# Altium PCB PCB.PcbDoc
Units mm, origin at the board's own origin, x right, y up, seen from the top; angles counter-clockwise.
Board outline 65.52 x 55.9 mm, 2 copper layers (Top Layer, Bottom Layer); 9 components, 53 nets, 128 pads, 12 vias.
Unrouted connection lines stored in the file: 59.
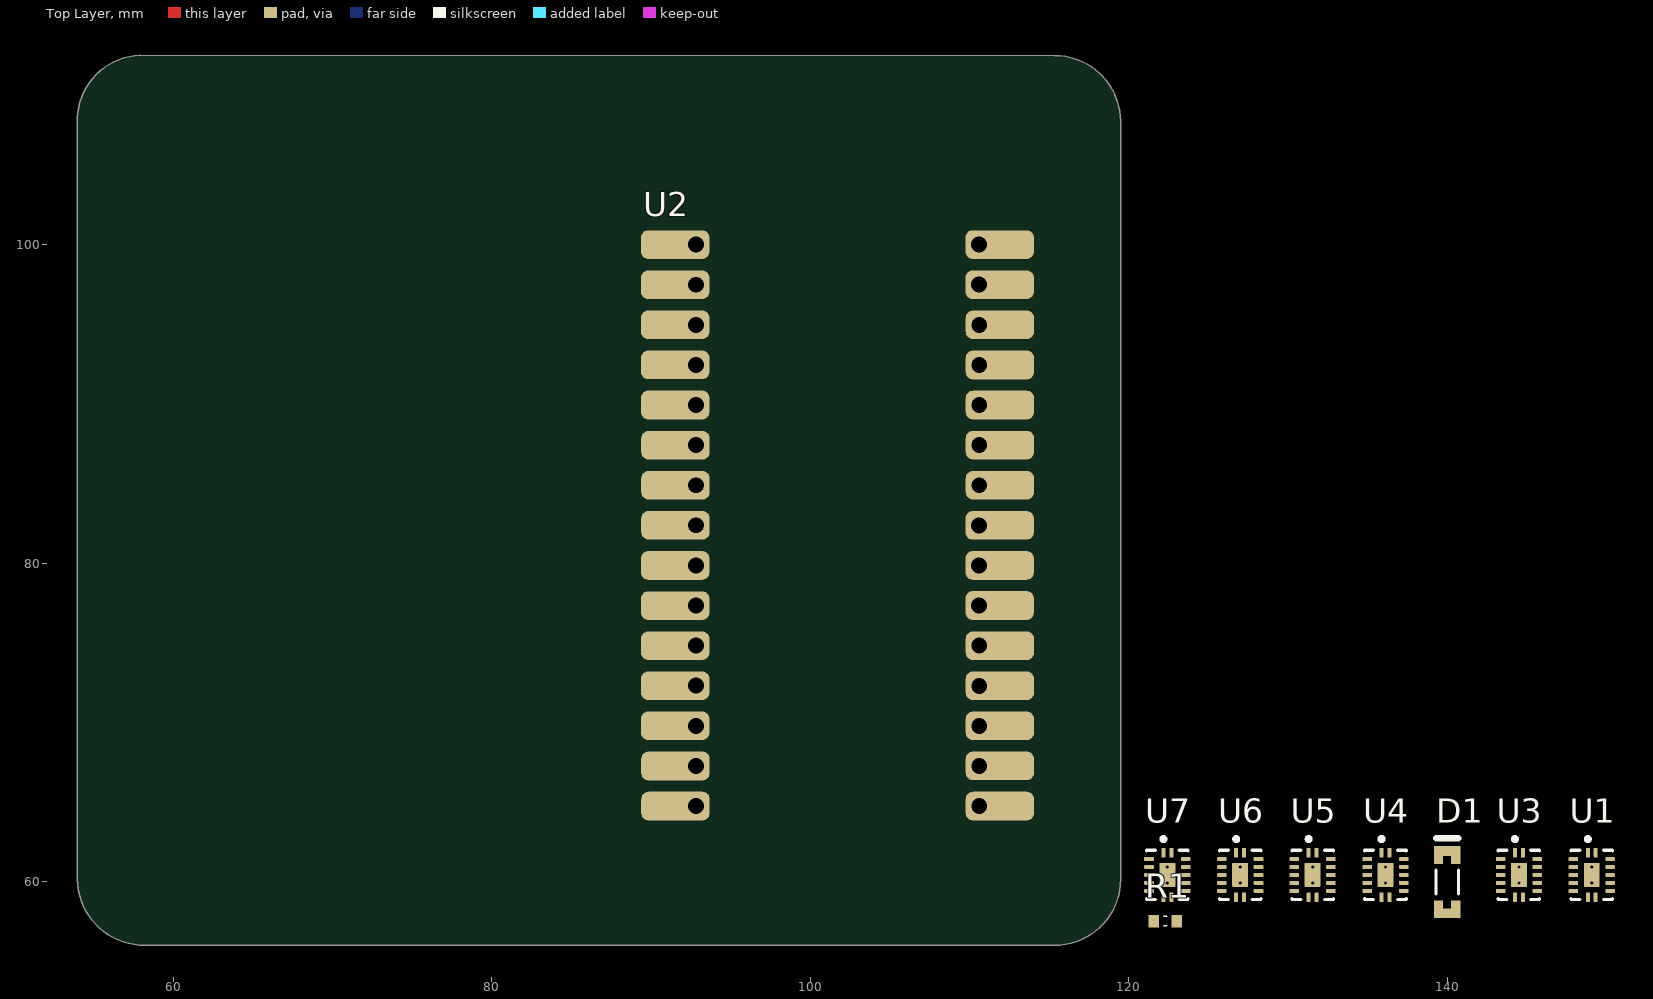
[diagram p0: Top Layer view]
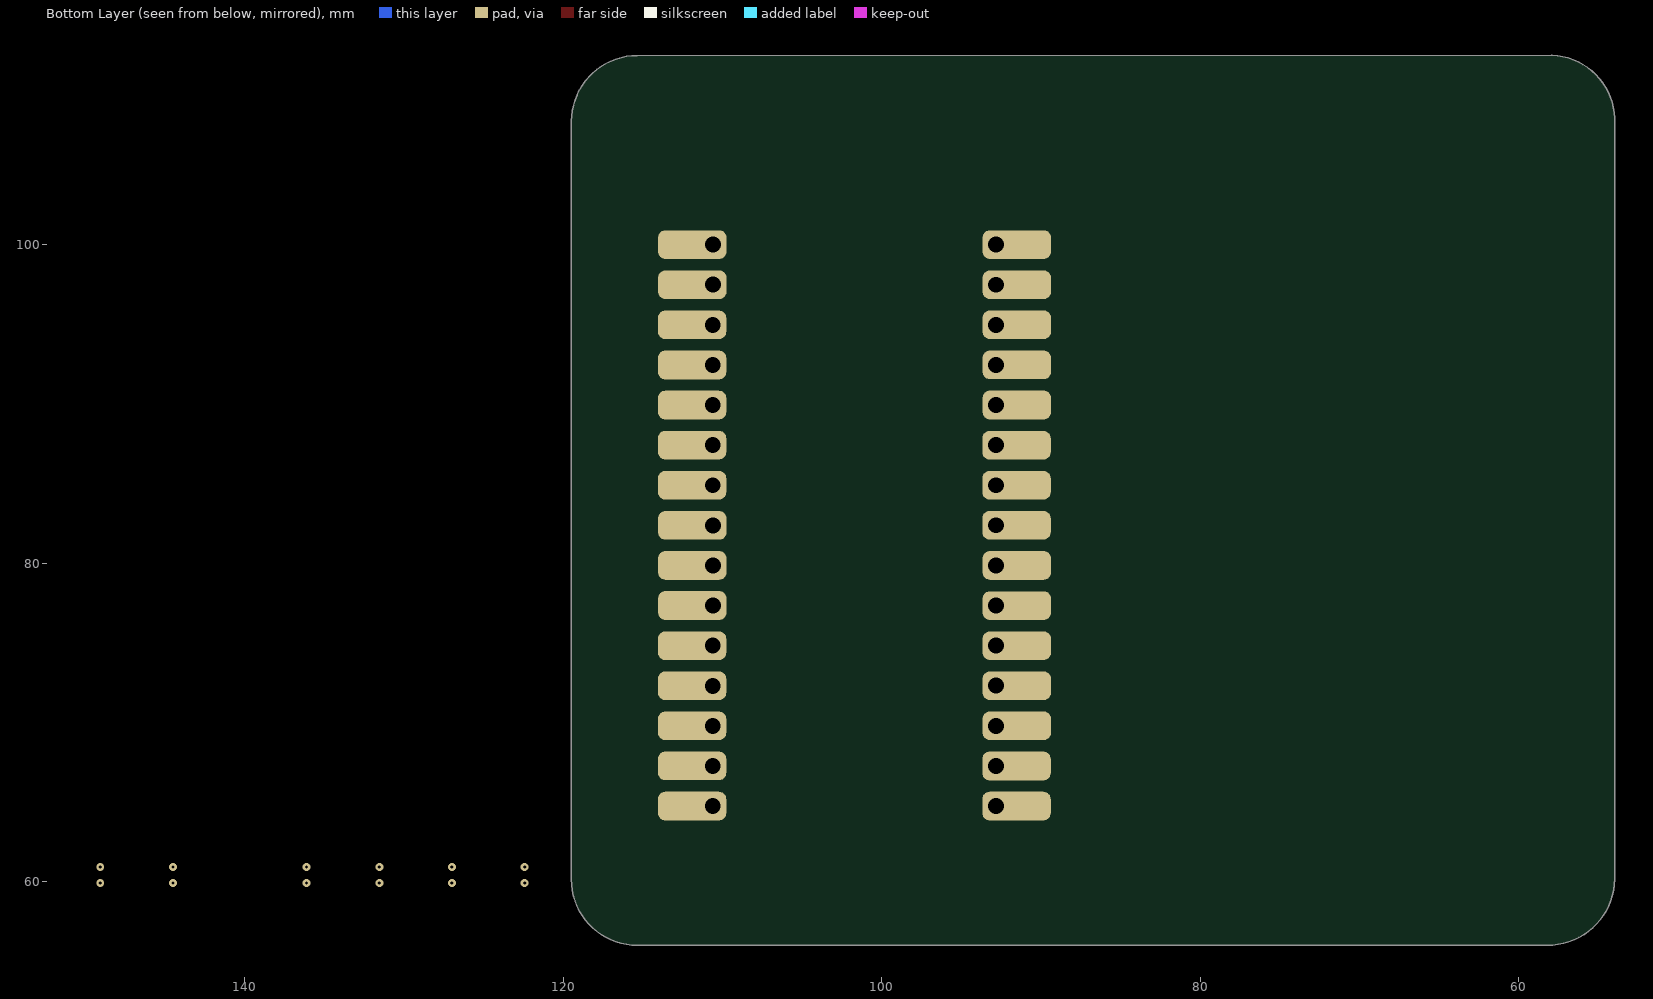
[diagram p1: Bottom Layer view, seen from below]

## Layer stack, top to bottom
Top Solder: solder mask 0.0102, Solder Resist, Dk 3.5
Top Layer: signal copper 0.0356
Dielectric 1: dielectric 0.32, FR-4, Dk 4.8
Bottom Layer: signal copper 0.0356
Bottom Solder: solder mask 0.0102, Solder Resist, Dk 3.5

## Board outline
53.986,60.171 53.975,107.752 53.973,107.775 cw(c58.1,107.775) 53.975,107.903 53.976,107.944 cw(c58.1,107.775) 57.916,111.898 57.954,111.904 115.356,111.877 cw(c115.356,107.743) 119.49,107.743 119.49,107.733 119.494,60.142 cw(c115.358,60.142) 115.358,56.007 58.232,56.011 cw(c58.19,60.214)

## Design rules (kind name [scope] priority, off if disabled: settings)
Clearance [All] p1: gap=0.254 ignorepadtopadclearanceinfootprint=FALSE
PolygonConnect [All] p1: connectstyle=Relief reliefconductorwidth=0.254 reliefentries=4 polygonreliefangle="90 Angle" airgapwidth=0.254
RoutingVias [All] p1: holewidth=0.711 width=1.27 viastyle="Through Hole" minholewidth=0.711 minwidth=1.27 maxholewidth=0.711 maxwidth=1.27
SolderMaskExpansion [All] p1: expansion=0.102 istentingtop=FALSE
SupplyNets "Schematic Supply Nets_2" [InNet('+5')] p1: voltage=0.000
SupplyNets "Schematic Supply Nets_1" [InNet('3v3')] p2: voltage=0.000
SupplyNets "Schematic Supply Nets" [InNet('GND')] p3: voltage=0.000
Width [All] p1: maxlimit=0.254 minlimit=0.254 preferedwidth=0.254
30 further rules are at their usual default settings.

## Components (designator, comment, footprint, x,y, rotation, side; value= is the part's Value field where it differs from the comment)
D1 "LL4148" FAIR-SOD80-2_V 140.007,59.978 r90 top
R1 "R0603" "Res 0603" 122.3,57.525 r0 top
U1 "TXU0104BQAR" FP-BQA0014A-MFG 149.082,60.428 r0 top
U2 "Pico RP2040" "raspberry pico solder plate" 110.62,64.737 r0 top
U3 "TXU0104BQAR" FP-BQA0014A-MFG 144.507,60.428 r0 top
U4 "TXU0104BQAR" FP-BQA0014A-MFG 136.132,60.428 r0 top
U5 "TXU0104BQAR" FP-BQA0014A-MFG 131.556,60.428 r0 top
U6 "TXU0104BQAR" FP-BQA0014A-MFG 127.006,60.428 r0 top
U7 "TXU0104BQAR" FP-BQA0014A-MFG 122.431,60.428 r0 top

## Footprints (in the part's own frame and the unit in brackets; to place one, negate y for a bottom-side part, rotate by r counter-clockwise, add the part's x,y. Pads: shape width x height; smd on the part's side, far side on the other; paste and mask are expansions set on the pad)
FAIR-SOD80-2_V [mm] "SOD, 2-Leads, Body 3.45x1.4mm"
  rect 0.6x1.65 smd: 1(-1.95,0) 2(1.95,0)
  rect 1.1x0.575 smd: ""(-1.7,-0.537) ""(-1.7,0.537) ""(1.7,-0.537) ""(1.7,0.537)
  silkscreen extent -0.75,-0.7 2.75,0.7, body extent -1.73,-0.7 1.73,0.7, height 2.1
FP-BQA0014A-MFG [mm]
  rrect40% 0.25x0.6 smd paste+0 mask+0: 1(-0.25,1.4) 7(-0.25,-1.4) 8(0.25,-1.4) 14(0.25,1.4)
  rrect40% 0.6x0.25 smd paste+0 mask+0: 2(-1.15,1) 3(-1.15,0.5) 4(-1.15,0) 5(-1.15,-0.5) 6(-1.15,-1) 9(1.15,-1) 10(1.15,-0.5) 11(1.15,0) 12(1.15,0.5) 13(1.15,1)
  rrect10% 1x1.5 smd paste-1000 mask+0: 15(0,0)
  silkscreen extent -1.3,-1.55 1.3,2.37, body extent -1.55,-1.8 1.55,1.8, height 0.25
"raspberry pico solder plate" [mm]
  rrect50% 4.3x1.8 hole 1 copper offset -1.3,0: 7(-17.795,5.052) 7(-17.795,7.572) 7(-17.795,10.087) 7(-17.795,12.602) 7(-17.795,15.123) 7(-17.795,25.198) 7(-17.795,27.718) 7(-17.795,30.233) 7(-17.795,32.748) 7(-17.795,35.269) 7(-17.775,0.014) 7(-17.775,2.529) 7(-17.775,17.645) 7(-17.775,20.16) 7(-17.775,22.675)
  rrect50% 4.3x1.8 hole 1 copper offset 1.3,0: 7(-0.02,12.608) 7(-0.02,15.123) 7(-0.02,17.638) 7(-0.02,32.754) 7(-0.02,35.269) 7(0,0.014) 7(0,2.535) 7(0,5.05) 7(0,7.565) 7(0,10.085) 7(0,20.16) 7(0,22.681) 7(0,25.196) 7(0,27.711) 7(0,30.231)
"Res 0603" [mm]
  rect 0.65x0.8 smd: 1(-0.725,0) 2(0.725,0)
  silkscreen extent -0.1,-0.3 0.1,0.3, body extent -0.8,-0.4 0.8,0.4, height 0.45

## Part data
D1: library part CMP-2000-05115-2, "Small Signal Diode, 100 V, 0.2 A, -55 to 175 degC, 2-Pin SOD80, RoHS, Tape and Reel", Average Forward Current-Max=200mA, Forward Voltage=1V, Manufacturer=Fairchild, Power Dissipation=500mW, Reverse Voltage-Max [Vrrm]=100V, Datasheet URL=https://www.fairchildsemi.com/datasheets/LL/LL4148.pdf, Datasheet Version="Rev. 1.8, 01/2016", Manufacturer URL=https://www.fairchildsemi.com/, Reverse Recovery Time-Max=1ns
U1 U3 U4 U5 U6 U7: library part CMP-04899-000128-1, "FOUR CHANNEL UNIDIRECTIONAL LEVE"

## Via types
v1: diameter 0.5, hole 0.2, Top Layer to Bottom Layer, 12 vias

## Nets (pads, with @x,y where several pads share a name; then routed paths per layer and width w, separated by ;. In a path a pad name is that pad's centre, name@x,y a point inside that pad or via, vN(x,y) a via of type N, cw(c..) or ccw(c..) an arc to the next point about the centre after c; other vN are vias at no path point)
3v3: U1.8 U1.14 U3.8 U3.14 U4.8 U4.14 U5.8 U5.14 U6.8 U6.14 U7.8 U7.14
+5: U1.1 U3.1 U4.1 U5.1 U6.1 U7.1
CHAN_0: U1.13
CHAN_1: U1.12
CHAN_2: U1.11
CHAN_3: U1.10 U2.7
CHAN_4: U3.13
CHAN_5: U3.12
CHAN_6: U3.11
CHAN_7: U3.10
CHAN_8: U4.13
CHAN_9: U4.12
CHAN_10: U4.11
CHAN_11: U4.10
CHAN_12: U5.13
CHAN_13: U5.12
CHAN_14: U5.11
CHAN_15: U5.10
CHAN_16: U6.13
CHAN_17: U6.12
CHAN_18: U6.11
CHAN_19: U6.10
CHAN_20: U7.13
CHAN_21: U7.12
CHAN_22: U7.11
CHAN_23: U7.10
EXT_CHAIN: D1.1
EXT_T: D1.2 R1.2
GND: R1.1 U1.7 U1.15 U3.7 U3.15 U4.7 U4.15 U5.7 U5.15 U6.7 U6.15 U7.7 U7.15
  other v1: 122.431,59.928 127.006,59.928 131.556,59.928 136.132,59.928 144.507,59.928 149.082,59.928 122.431,60.928 127.006,60.928 131.556,60.928 136.132,60.928 144.507,60.928 149.082,60.928
IN_CHAN_0: U1.2
IN_CHAN_1: U1.3
IN_CHAN_2: U1.4
IN_CHAN_3: U1.5
IN_CHAN_4: U3.2
IN_CHAN_5: U3.3
IN_CHAN_6: U3.4
IN_CHAN_7: U3.5
IN_CHAN_8: U4.2
IN_CHAN_9: U4.3
IN_CHAN_10: U4.4
IN_CHAN_11: U4.5
IN_CHAN_12: U5.2
IN_CHAN_13: U5.3
IN_CHAN_14: U5.4
IN_CHAN_15: U5.5
IN_CHAN_16: U6.2
IN_CHAN_17: U6.3
IN_CHAN_18: U6.4
IN_CHAN_19: U6.5
IN_CHAN_20: U7.2
IN_CHAN_21: U7.3
IN_CHAN_22: U7.4
IN_CHAN_23: U7.5
pads on no net: D1. U1.6 U1.9 U3.6 U3.9 U4.6 U4.9 U5.6 U5.9 U6.6 U6.9 U7.6 U7.9

## Silkscreen, mask and mechanical layers (free items; w line width, h text height)
Mechanical 1:
  lines w0.254: 54.1,107.775 cw(c58.1,107.775) 58.1,111.775 ; 54.102,107.925 54.113,60.172 ccw(c58.19,60.214) 58.232,56.138 115.358,56.134 ccw(c115.358,60.142) 119.366,60.142 119.362,107.733 ccw(c115.356,107.743) 115.356,111.75 57.954,111.777